# EAGLE board ArduinoNano LearningBot 4-2-18 (EAGLE 8.4.1)

Size 106.91 x 60.15 mm. Coordinates in mm from the lower left corner, seen from the top.
Outline: 72.09,3.12 81.05,15.3 arc-54 95.34,22.53 98.07,22.53 arc61 105.45,26.84 arc30 106.91,32.47 106.8,45.87 arc29 103.91,56.74 arc61 98.07,60.15 77.83,60.15 arc61 73.16,57.42 71.05,53.68 arc-61 67.63,51.68 40.88,51.68 arc-61 35.06,55.08 33.94,57.07 arc61 28.67,60.15 8.24,60.15 arc61 3.28,57.25 2.82,56.43 arc29 0.1,46.22 0,33.19 arc30 1.8,26.21 arc61 8.11,22.53 14.1,22.53 arc-54 24.32,17.33 33.94,4.08 arc54 41.96,0 65.93,0 arc54 72.09,3.12
Copper layers (1*16): Top 0.035mm / dielectric 1.5mm / Bottom 0.035mm
Design rules "default": minimum track width 6mil, minimum drill 0.35mm, track to track 6mil, track to pad 6mil, pad to pad 6mil, via to via 6mil, smd to smd 6mil, copper to edge 40mil, drill to drill 6mil, minimum pad ring 10mil, minimum via ring 8mil, stop-mask expansion 4mil, vias tented up to drill 0mil, thermal gap 10mil

## Footprints (pad centres in the part's own frame; a part is rotated, then mirrored left to right if it is on the bottom)
B3F-10XX = drill 1.016 long: 1 -3.251,2.261; 2 3.251,2.261; 3 -3.251,-2.261; 4 3.251,-2.261
1X04_LOCK = drill 1.016 pad 1.88 square: 1 0,0.127 | drill 1.016 pad 1.88: 2 2.54,-0.127; 3 5.08,0.127; 4 7.62,-0.127
WS2812B = smd 1.5 x 0.9: 1-VDD 2.45,-1.65; 2-DOUT 2.45,1.65; 3-GND -2.45,1.65; 4-DIN -2.45,-1.65
3RP/1610N-VERTICAL = drill 1.2 pad 2.184: 1 -5,0; 2 0,0; 3 5,0
PS22F03 = drill 0.6 square: 0 -3.175,5.715; 1 3.835,5.613; 2 3.81,-5.715; 3 -3.175,-5.715; C1 -1.27,0; C2 1.702,0; NC1 -1.27,-3.175; NC2 1.727,-3.226; NO1 -1.27,3.175; NO2 1.702,3.15
AXIAL-0.4 = drill 0.9 pad 1.88: P$1 -5.08,0; P$2 5.08,0
1X03_LOCK = drill 1.016 pad 1.88: 1 0,0.127; 2 2.54,-0.127; 3 5.08,0.127
AL60P = drill 1.016 pad 2.54 octagon: 1 -3.759,0; 2 3.759,0
ARDUINO-CLONE_NANO = drill 0.8 long: 3.3V -10.16,24.13; 5V -10.16,-1.27; A0 -10.16,19.05; A1 -10.16,16.51; A2 -10.16,13.97; A3 -10.16,11.43; A4 -10.16,8.89; A5 -10.16,6.35; A6 -10.16,3.81; A7 -10.16,1.27; AREF -10.16,21.59; D2 5.08,1.27; D3 5.08,3.81; D4 5.08,6.35; D5 5.08,8.89; D6 5.08,11.43; D7 5.08,13.97; D8 5.08,16.51; D9 5.08,19.05; D10 5.08,21.59; D11 5.08,24.13; D12 5.08,26.67; D13 -10.16,26.67; GND -10.16,-6.35; GND1 5.08,-1.27; RAW -10.16,-8.89; RST -10.16,-3.81; RST1 5.08,-3.81; RX1 5.08,-6.35; TX0 5.08,-8.89

## Placement (x,y rotation side)
DIGITAL_PUSHBUTTON  [B3F-10XX]  16.46,35.81 0 top
IRSENSOR1  [1X04_LOCK]  9.66,-71.71 0 top  (outside the outline)
IRSENSOR2  [1X04_LOCK]  9.66,-52.66 0 top  (outside the outline)
LDR1  [1X04_LOCK]  9.66,-14.56 0 top  (outside the outline)
LDR2  [1X04_LOCK]  9.66,-33.61 0 top  (outside the outline)
LED1  WS2812B5050  [WS2812B]  68.38,43.1 0 top
LED2  WS2812B5050  [WS2812B]  37.93,43.1 0 top
LED3  WS2812B5050  [WS2812B]  7.19,27.93 0 top
LED4  WS2812B5050  [WS2812B]  7.19,52.55 0 top
LED5  WS2812B5050  [WS2812B]  100.16,27.93 0 top
LED6  WS2812B5050  [WS2812B]  100.16,52.55 0 top
POTENTIOMETER  [3RP/1610N-VERTICAL]  86.11,49.91 180 top
POWER_SWITCH  [PS22F03]  72.77,17.47 45 top
R1  10k  [AXIAL-0.4]  14.74,-109.81 0 top  (outside the outline)
SERVO1  [1X03_LOCK]  27.05,31.41 0 top
SERVO2  [1X03_LOCK]  26.95,28.37 0 top
SP1  SPEAKER/AL60P  [AL60P]  16.03,45.56 0 top
TOUCH_SENSOR  [1X03_LOCK]  9.66,-90.76 0 top  (outside the outline)
U$1  ARDUINO-CLONE_NANO  [ARDUINO-CLONE_NANO]  55.78,11.22 0 top
ULTRASONICSENSOR  [1X04_LOCK]  49.43,42.26 0 top

## Library data of the parts
DIGITAL_PUSHBUTTON = switch-omron; MPN: B3F-1000; OC_FARNELL: 176432; OC_NEWARK: 36M3542
IRSENSOR1 IRSENSOR2 LDR1 LDR2 ULTRASONICSENSOR = SparkFun-Connectors; PROD_ID: CONN-09696
LED1-LED6 SP1 = adafruit
POTENTIOMETER = pot
POWER_SWITCH U$1 = ArduinoNano LearningBot 3-15-18
R1 = SparkFun-Passives
SERVO1 SERVO2 TOUCH_SENSOR = SparkFun-Connectors

## Nets
DIGITAL_PUSHBUTTON_PIN: DIGITAL_PUSHBUTTON.1 U$1.D4
GND: IRSENSOR1.2 IRSENSOR2.2 LDR1.2 LDR2.2 LED1.3-GND LED2.3-GND LED3.3-GND LED4.3-GND LED5.3-GND LED6.3-GND POTENTIOMETER.2 R1.P$2 SERVO1.1 SERVO2.1 SP1.1 TOUCH_SENSOR.1 U$1.GND ULTRASONICSENSOR.4
IR_SENSOR1_AO: IRSENSOR1.4 U$1.A3
IR_SENSOR1_DO: IRSENSOR1.3 U$1.D12
IR_SENSOR2_AO: IRSENSOR2.4 U$1.A1
IR_SENSOR2_DO: IRSENSOR2.3 U$1.D9
LDR1_AO: LDR1.4 U$1.A2
LDR1_DO: LDR1.3 U$1.D13
LDR2_AO: LDR2.4 U$1.A0
LDR2_DO: LDR2.3 U$1.D8
N$3: DIGITAL_PUSHBUTTON.2 R1.P$1
N$7: POTENTIOMETER.3 U$1.A4
SERVO1_PIN: SERVO1.3 U$1.D6
SERVO2_PIN: SERVO2.3 U$1.D5
SPEAKERPIN: SP1.2 U$1.D3
TOUCH_SENSOR: TOUCH_SENSOR.3 U$1.D2
ULTRASONICSENSOR_PIN: U$1.D7 ULTRASONICSENSOR.2 ULTRASONICSENSOR.3
VCC: DIGITAL_PUSHBUTTON.4 IRSENSOR1.1 IRSENSOR2.1 LDR1.1 LDR2.1 LED1.1-VDD LED2.1-VDD LED3.1-VDD LED4.1-VDD LED5.1-VDD LED6.1-VDD POTENTIOMETER.1 SERVO1.2 SERVO2.2 TOUCH_SENSOR.2 ULTRASONICSENSOR.1

## Tracks (layer width: path | path; a pad name or v marks a point on that pad's centre or on a via)
DIGITAL_PUSHBUTTON_PIN  (1 unrouted)
GND  (17 unrouted)
IR_SENSOR1_AO  (1 unrouted)
IR_SENSOR1_DO  (1 unrouted)
IR_SENSOR2_AO  (1 unrouted)
IR_SENSOR2_DO  (1 unrouted)
LDR1_AO  (1 unrouted)
LDR1_DO  (1 unrouted)
LDR2_AO  (1 unrouted)
LDR2_DO  (1 unrouted)
N$3  (1 unrouted)
N$7  (1 unrouted)
SERVO1_PIN  (1 unrouted)
SERVO2_PIN  (1 unrouted)
SPEAKERPIN  (1 unrouted)
TOUCH_SENSOR  (1 unrouted)
ULTRASONICSENSOR_PIN  (2 unrouted)
VCC  (15 unrouted)